# Altium PCB MotherBoard.PcbDoc
Units mil, origin at the board's own origin, x right, y up, seen from the top; angles counter-clockwise.
Board outline 6000 x 4000 mil, 2 copper layers (Top Layer, Bottom Layer); 39 components, 68 nets, 217 pads, 9 vias.
Unrouted connection lines stored in the file: 48.
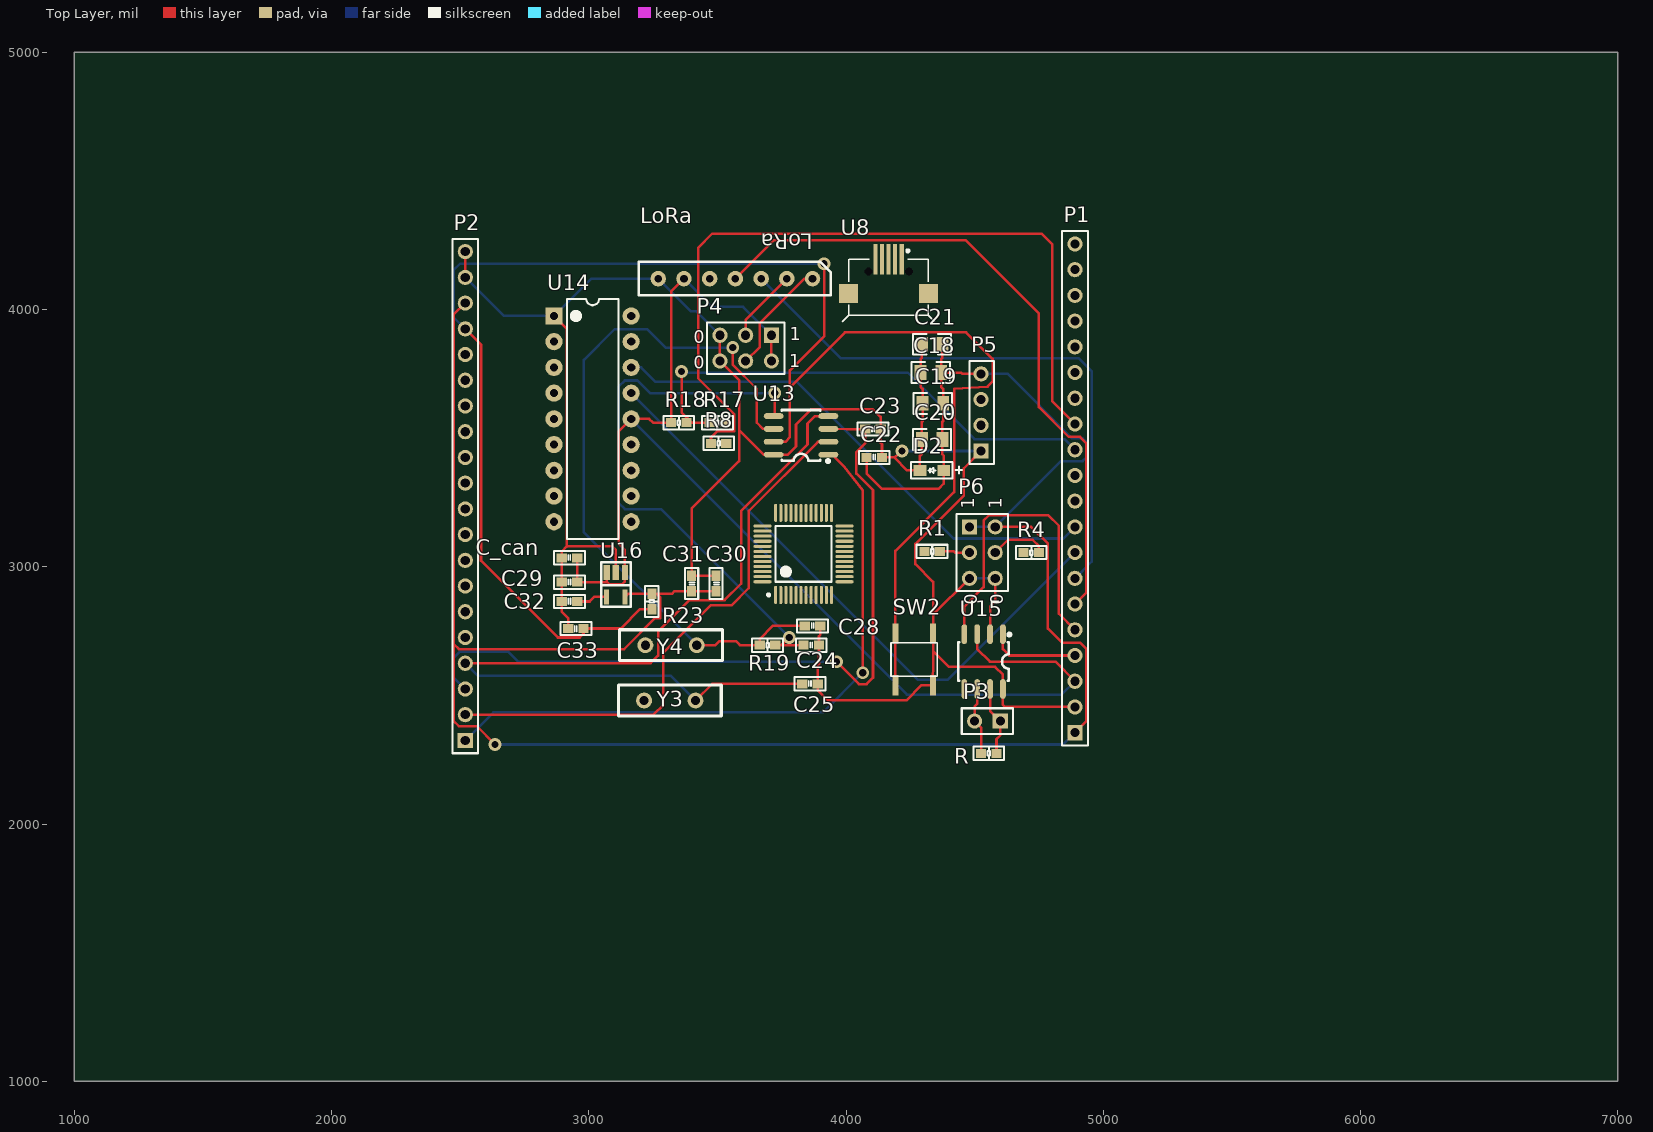
[diagram p0: Top Layer view]
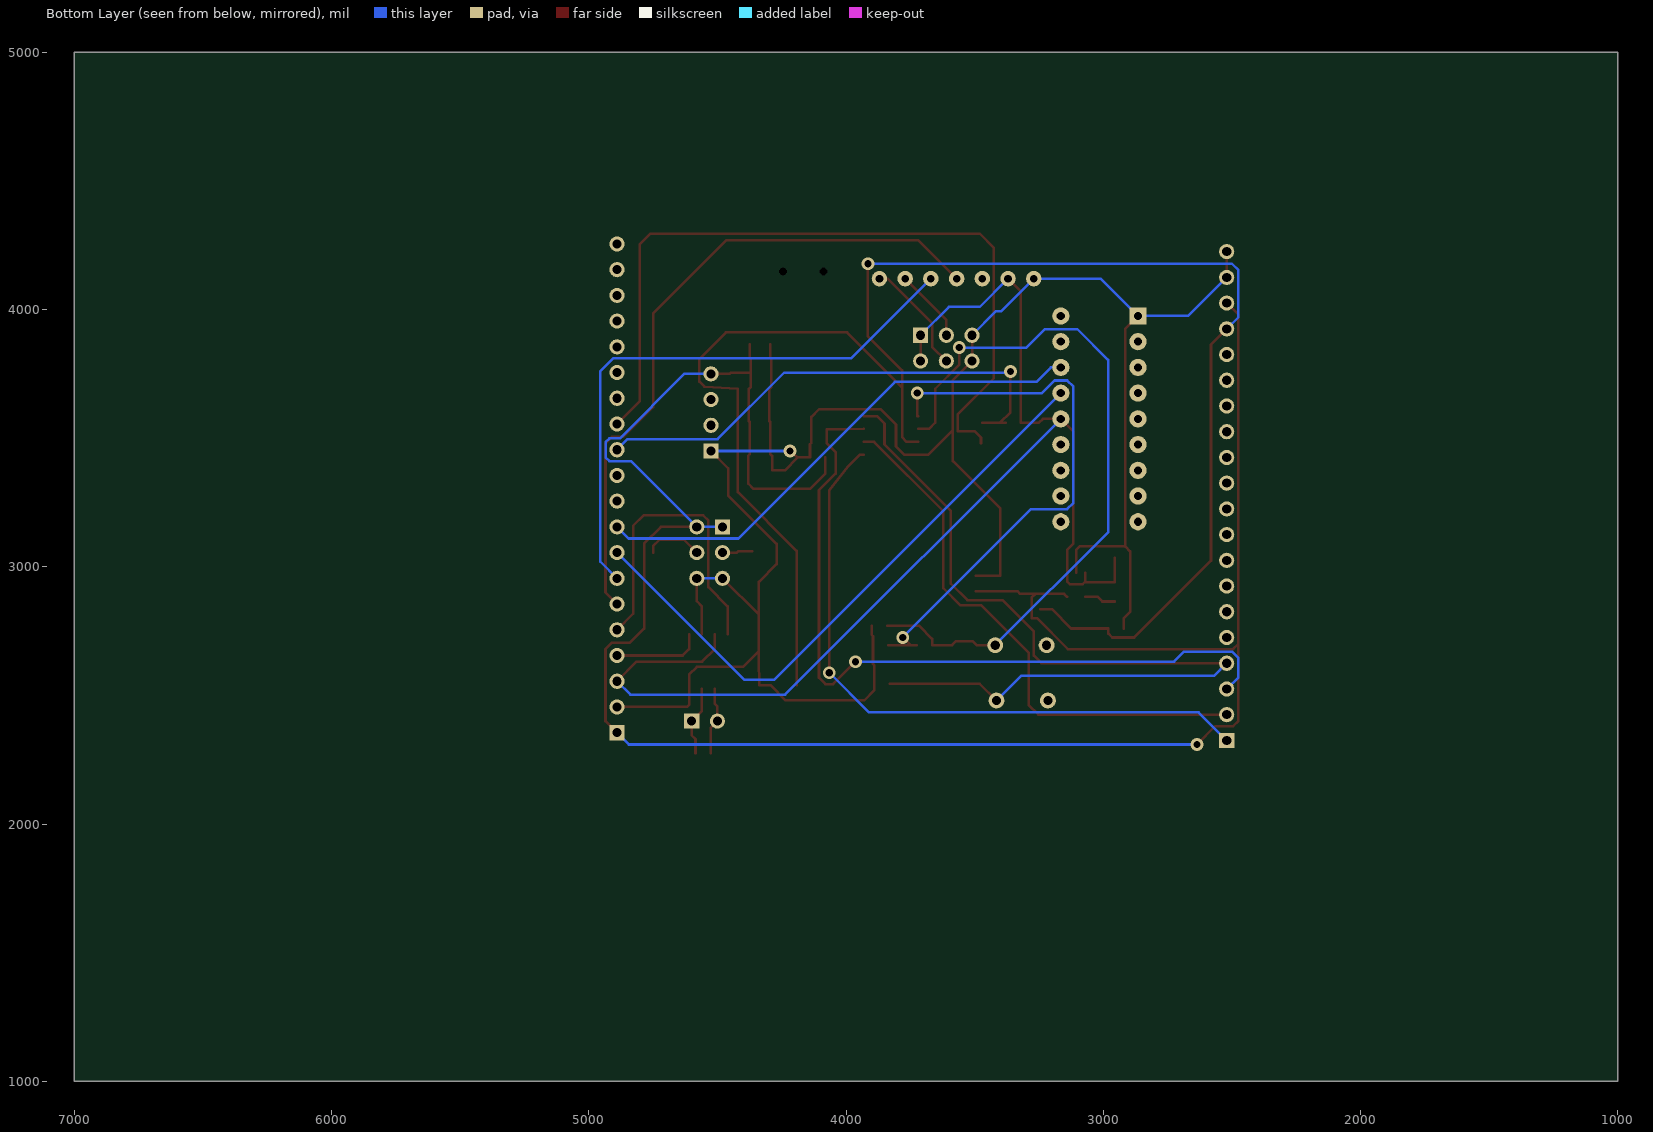
[diagram p1: Bottom Layer view, seen from below]

## Layer stack, top to bottom
Top Solder: solder mask 0.4, Solder Resist, Dk 3.5
Top Layer: signal copper 1.4
Dielectric 1: dielectric 12.6, FR-4, Dk 4.8
Bottom Layer: signal copper 1.4
Bottom Solder: solder mask 0.4, Solder Resist, Dk 3.5

## Board outline
1000,1000 7000,1000 7000,5000 1000,5000

## Design rules (kind name [scope] priority, off if disabled: settings)
Clearance [All] p1: gap=10 ignorepadtopadclearanceinfootprint=FALSE except(0: Arc-Hole Track-Hole SMDPad-Hole THPad-Hole Via-Hole Fill-Hole Poly-Hole Region-Hole Text-Hole)
PolygonConnect [All] p1: connectstyle=Relief reliefconductorwidth=10 reliefentries=4 polygonreliefangle="90 Angle" airgapwidth=10
RoutingVias [All] p1: holewidth=28 width=50 viastyle="Through Hole" minholewidth=28 minwidth=50 maxholewidth=28 maxwidth=50
SolderMaskExpansion [All] p1: expansion=4 istentingtop=FALSE
Width [All] p1: maxlimit=10 minlimit=10 preferedwidth=10
30 further rules are at their usual default settings.

## Components (designator, comment, footprint, x,y, rotation, side; value= is the part's Value field where it differs from the comment)
C18 "104" 0805 4330,3755 r0 top
C19 "104" 0805 4337.83,3635.39 r0 top
C20 "104" 0805 4335,3495 r0 top
C21 "104" 0805 4335,3865 r0 top
C22 "104,0603" C0603 4110,3425 r180 top value=104
C23 "20p,0603" C0603 4105,3535 r180 top value=104
C24 "20p,0603" C0603 3860,2545 r180 top value=104
C25 "20p,0603" C0603 3865,2695 r180 top value=104
C28 "20p,0603" C0603 3870,2770 r180 top value=104
C29 "105,0603" C0603 2925.08,2940 r180 top value=104
C30 "106,0603" C0603 3495,2934.92 r90 top value=104
C31 "104,0603" C0603 3400,2934.92 r90 top value=104
C32 "223,0603" C0603 2925.08,2865 r180 top value=104
C33 "105,0603" C0603 2950,2760 r0 top value=104
C_can "105,0603" C0603 2925,3035 r180 top value=104
D2 "LED" LED 4333.74,3375 r0 top
LoRa "LoRa_Output" LoRa_Output 4020,3720 r180 top
P1 "Header 20" HDR1X20 4890,2355 r90 top
P2 "Header 20" HDR1X20 2520,2325 r90 top
P3 "CAN Header" HDR1X2 4600,2400 r180 top
P4 "Header 3X2" HDR2X3 3710,3900 r180 top
P5 "SWD" HDR1X4 4525,3450 r90 top
P6 "Header 3X2" HDR2X3 4480,3155 r270 top
R "120R,0603" R0603 4555.08,2275 r0 top
R1 "100K,0603" R0603 4334.92,3060 r0 top
R4 "100K,0603" R0603 4720.08,3055 r0 top
R8 "20R,0603" R0603 3505.08,3480 r180 top
R17 "20R,0603" R0603 3499.92,3560 r180 top
R18 "4.7k,0603" R0603 3350,3560 r0 top
R19 "1M,0603" R0603 3695,2695 r0 top
R23 "10K,0603" R0603 3245,2865 r90 top
SW2 "SW-PB_V" KEY-SMT 4265,2640 r90 top
U8 "USB-mrico" Micro_USB 4165.59,4128.9 r0 top
U13 "STM32F103C8T6" 48P 3835,3050 r90 top
U14 "TM1636" DIP18 3015,3575 r0 top
U15 "TJA1050T/CM,118" SOIC-8_L5.0-W4.0-P1.27-LS6.0-BL 4535,2631.5 r180 top
U16 "RT9193" SOT-23-5 3105,2930 r180 top
Y3 "32.768K" XTAL1 3415,2480 r180 top
Y4 "8Mhz" XTAL1 3420,2695 r180 top

## Footprints (in the part's own frame and the unit in brackets; to place one, negate y for a bottom-side part, rotate by r counter-clockwise, add the part's x,y. Pads: shape width x height; smd on the part's side, far side on the other; paste and mask are expansions set on the pad)
48P [mm]
  oval 1.8x0.3 smd: 1(-4.05,2.75) 2(-4.05,2.25) 3(-4.05,1.75) 4(-4.05,1.25) 5(-4.05,0.75) 6(-4.05,0.25) 7(-4.05,-0.25) 8(-4.05,-0.75) 9(-4.05,-1.25) 10(-4.05,-1.75) 11(-4.05,-2.25) 12(-4.05,-2.75) 25(4.05,-2.75) 26(4.05,-2.25) 27(4.05,-1.75) 28(4.05,-1.25) 29(4.05,-0.75) 30(4.05,-0.25) 31(4.05,0.25) 32(4.05,0.75) 33(4.05,1.25) 34(4.05,1.75) 35(4.05,2.25) 36(4.05,2.75)
  oval 0.568x1.95 smd mask+0.051: 1(9.802,-2.454) 2(11.072,-2.454) 3(12.342,-2.454) 4(13.612,-2.454) 5(13.612,2.956) 6(12.342,2.956) 7(11.072,2.956) 8(9.802,2.956)
  oval 0.3x1.8 smd: 13(-2.75,-4.05) 14(-2.25,-4.05) 15(-1.75,-4.05) 16(-1.25,-4.05) 17(-0.75,-4.05) 18(-0.25,-4.05) 19(0.25,-4.05) 20(0.75,-4.05) 21(1.25,-4.05) 22(1.75,-4.05) 23(2.25,-4.05) 24(2.75,-4.05) 37(2.75,4.05) 38(2.25,4.05) 39(1.75,4.05) 40(1.25,4.05) 41(0.75,4.05) 42(0.25,4.05) 43(-0.25,4.05) 44(-0.75,4.05) 45(-1.25,4.05) 46(-1.75,4.05) 47(-2.25,4.05) 48(-2.75,4.05)
  silkscreen extent -4.17,-2.75 14.21,3.57, body extent -3.5,-3.5 3.5,3.5, height 1.6
0805 [mm]
  rect 1.16x1.45 smd: 1(-1.016,0) 2(1.016,0)
  silkscreen extent -1.9,-1.03 1.87,1.04
C0603 [mil]
  rect 40x35 smd: 1(-29.92,0) 2(29.92,0)
  silkscreen extent -60,-26 60,26
DIP18 [mm]
  rect 1.7x1.7 hole 0.8: 1(-3.81,10.16)
  round 1.7 hole 0.8: 2(-3.81,7.62) 3(-3.81,5.08) 4(-3.81,2.54) 5(-3.81,0) 6(-3.81,-2.54) 7(-3.81,-5.08) 8(-3.81,-7.62) 9(-3.81,-10.16) 10(3.81,-10.16) 11(3.81,-7.62) 12(3.81,-5.08) 13(3.81,-2.54) 14(3.81,0) 15(3.81,2.54) 16(3.81,5.08) 17(3.81,7.62) 18(3.81,10.16)
  silkscreen extent -2.54,-11.85 2.54,11.85, body extent -4,-11.54 4,11.56, height 4.35
HDR1X2 [mm] "Connector; Header; 2 Position"
  rect 1.5x1.5 hole 0.9: 1(0,0)
  round 1.5 hole 0.9: 2(2.54,0)
  silkscreen extent -1.27,-1.27 3.81,1.27
HDR1X4 [mm] "Connector; Header; 4 Position; Right Angle"
  rect 1.5x1.5 hole 0.9: 1(0,0)
  round 1.5 hole 0.9: 2(2.54,0) 3(5.08,0) 4(7.62,0)
  silkscreen extent -1.27,-1.27 8.89,1.14
HDR1X20 [mm] "Connector; Header; 20 Position"
  rect 1.5x1.5 hole 0.9: 1(0,0)
  round 1.5 hole 0.9: 2(2.54,0) 3(5.08,0) 4(7.62,0) 5(10.16,0) 6(12.7,0) 7(15.24,0) 8(17.78,0) 9(20.32,0) 10(22.86,0) 11(25.4,0) 12(27.94,0) 13(30.48,0) 14(33.02,0) 15(35.56,0) 16(38.1,0) 17(40.64,0) 18(43.18,0) 19(45.72,0) 20(48.26,0)
  silkscreen extent -1.27,-1.27 49.53,1.27
HDR2X3 [mm] "Connector; Header; 3x2 Position"
  rect 1.5x1.5 hole 0.9: 1(0,0)
  round 1.5 hole 0.9: 2(0,2.54) 3(2.54,0) 4(2.54,2.54) 5(5.08,0) 6(5.08,2.54)
  silkscreen extent -1.27,-1.27 6.35,3.81
KEY-SMT [mm]
  rect 2x0.6 smd: 1(-2.55,-1.85) 1(2.55,-1.87) 2(-2.55,1.85) 2(2.55,1.85)
  silkscreen extent -1.65,-2.29 1.65,2.29
LED [mil]
  rect 49x43 smd: 1(46.26,0) 2(-46.26,0)
  silkscreen extent -81,-31 118,31
LoRa_Output [mil]
  round 60 hole 30: 1(150,-400) 2(250,-400) 3(350,-400) 4(450,-400) 5(550,-400) 6(650,-400) 7(750,-400)
  silkscreen extent 80,-465 825,-335
Micro_USB [mm]
  rect 0.4x3 smd: 1(1.3,1.679) 2(0.65,1.679) 3(0,1.679) 4(-0.65,1.679) 5(-1.3,1.679)
  round 0 hole 0.8 unplated: MH1(2,0.471) MH2(-2,0.471)
  rect 1.9x1.9 smd: ""(-3.95,-1.679) ""(3.95,-1.679)
  silkscreen extent -4.57,-4.46 4.57,2.64
R0603 [mil]
  rect 40x35 smd: 1(-29.92,0) 2(29.92,0)
  silkscreen extent -60,-26 60,26
SOIC-8_L5.0-W4.0-P1.27-LS6.0-BL [mil]
  oval 22.38x76.78 smd mask+2: 1(-75,-106.5) 2(-25,-106.5) 3(25,-106.5) 4(75,-106.5) 5(75,106.5) 6(25,106.5) 7(-25,106.5) 8(-75,106.5)
  silkscreen extent -106,-111 98,75
SOT-23-5 [mm]
  rect 0.6x1.5 smd: 1(-0.9,-1.2) 2(0,-1.2)
  rect 0.63x1.5 smd: 3(0.9,-1.2)
  rect 0.5x1.5 smd: 4(0.9,1.2) 5(-0.9,1.2)
  silkscreen extent -1.47,-2.21 1.43,2.18
XTAL1 [mil]
  round 62 hole 35.43: 1(0,0) 2(200,0)
  silkscreen extent -100,-60 300,60

## Part data
C18 C19 C20 C21: library part 105, BOM_Manufacturer=FH, BOM_Manufacturer Part=0805B103K101NT, BOM_Supplier=LCSC, BOM_Supplier Part=C128805, Contributor=LCSC, nameAlias=Capacitance, spicePre=C, spiceSymbolName=0805B103K101NT
C22 C23 C24 C25 C28 C29 C30 C31 C32 C33 C_can: library part Cap, "Capacitor", LatestRevisionDate=17-Jul-2002, LatestRevisionNote="Re-released for DXP Platform.", Published=8-Jun-2000, Publisher="Altium Limited"
P1 P2: "Header, 20-Pin", LatestRevisionDate=17-Jul-2002, LatestRevisionNote="Re-released for DXP Platform.", Publisher="Altium Limited"
P3: library part "Header 2", "Header, 2-Pin", LatestRevisionDate=17-Jul-2002, LatestRevisionNote="Re-released for DXP Platform.", Publisher="Altium Limited"
P4 P6: "Header, 3-Pin, Dual row", LatestRevisionDate=17-Jul-2002, LatestRevisionNote="Re-released for DXP Platform.", Publisher="Altium Limited"
P5: library part "Header 4", "Header, 4-Pin", LatestRevisionDate=17-Jul-2002, LatestRevisionNote="Re-released for DXP Platform.", Publisher="Altium Limited"
R R1 R4 R8 R17 R18 R19 R23: library part Res2, "Resistor", LatestRevisionDate=17-Jul-2002, LatestRevisionNote="Re-released for DXP Platform.", Published=8-Jun-2000, Publisher="Altium Limited"
SW2: "SWITCH"
U8: library part usb-STM
U14: "TM1636LED控制芯片"
U15: JLCPCB Part Class="Basic Part", Manufacturer=NXP(恩智浦), Supply Voltage="4.75V ~ 5.25V", Add into BOM=yes, Convert to PCB=yes, Datasheet=https://atta.szlcsc.com/upload/public/pdf/source/20140411/1457707042917.pdf, Device=TJA1050T/CM,118, LCSC Part Name=TJA1050T/CM,118, Manufacturer Part=TJA1050T/CM,118, Name=TJA1050T/CM,118, Protocol=CAN总线, Supplier=LCSC, Supplier Footprint=SOIC-8_150mil, Supplier Part=C6952, Symbol=TJA1050T/CM,118, Type=收发器
U16: library part RT9193X_5P, ICA_MFR_NAME=RICHTEK, ICA_PARTNUM=$$2191094$$RT9193-15CU5, Part Number=TMP-13
Y3 Y4: library part XTAL, "Crystal Oscillator", LatestRevisionDate=17-Jul-2002, LatestRevisionNote="Re-released for DXP Platform.", Published=8-Jun-2000, Publisher="Altium Limited"

## Via types
v1: diameter 50, hole 28, Top Layer to Bottom Layer, 9 vias

## Nets (pads, with @x,y where several pads share a name; then routed paths per layer and width w, separated by ;. In a path a pad name is that pad's centre, name@x,y a point inside that pad or via, vN(x,y) a via of type N, cw(c..) or ccw(c..) an arc to the next point about the centre after c; other vN are vias at no path point)
3.3V: C18.2 C19.2 C20.2 C21.2 C22.2 C30.1 C31.1 D2.1 P1.1 P2.18 P5.4 P6.1 P6.2 R23.2 U13.9 U13.24 U13.36 U13.48 U16.5 | length 8778.6
  Top Layer w10: P2.18 2475,3980 2475,2700 ; v1(2636,2309) 2565,2380 2495,2380 2475,2400 2475,2700 ; U16.5 3152.6,2894.92 R23.2 3263.08,2894.92 ; C30.1 C31.1 3333.08,2905 3323,2894.92 3263.08,2894.92 ; C22.2 4080.08,3362.42 4139.5,3303 4360,3303 4380,3323 D2.1 4380,3432 4375,3437 C20.2 4375,3563 4377.83,3565.83 C19.2 4377.83,3691 4370,3698.83 C18.2 ; C21.2 4375,3812 4370,3807 C18.2 ; P5.4 4452,3750 4447,3755 C18.2 ; P6.2 4720,3155 4785,3090 4785,2760 4840,2705 4910,2705 4935,2680 4935,2400 P1.1 ; 2475,2700 2495,2680 3138,2680 3258,2800 3278,2800 3278,2880 3263.08,2894.92
  Bottom Layer w10: v1(2636,2309) 4844,2309 P1.1 ; P6.1 P6.2 4835.47,3410.47 4920,3410.47 4934.53,3425 4934.53,3485 4920,3499.53 4879.47,3499.53 4629,3750 P5.4
5V: C29.1 C_can.1 LoRa.6 P1.3 P4.1 P4.2 R18.1 U14.14 U15.3 U16.1 U16.3 | length 4942.8
  Top Layer w10: C_can.1 2954.92,2987.08 2955,2987 C29.1 3069.57,2940 3069.57,2942.43 ; U16.3 3069.57,2942.43 ; LoRa.6 3320.08,4070.08 R18.1 3250,3560 3235,3575 U14.14 3116,3526 3116,3090.43 3140.43,3066 U16.1 3140.43,2942.43 3130,2932 3080,2932 3069.57,2942.43 ; P4.2 P4.1 ; U15.3 4510,2680 4559,2631 4814,2631 P1.3
  Bottom Layer w10: U14.14 4237,2503 4838,2503 P1.3 ; LoRa.6 3480,4010 3600,4010 P4.1
A0: P2.5 U13.10
A1: P2.6 U13.11
A2: P2.7 U13.12
A3: P2.8 U13.13
A4: P2.9 U13.14
A5: P2.10 U13.15
A6: P2.11 U13.16
A7: P2.12 U13.17
A8: P1.16 U13.29
A9: P1.15 U13.30
A10: P1.14 U13.31
A11: P1.13 R8.2 U13.32 | length 3044.7
  Top Layer w10: R8.2 3475.16,3502.16 3500,3527 3564.84,3527 3564.84,3593 3425,3732.84 3425,4240 3480,4295 4760,4295 4802,4253 4802,3643 P1.13
A12: P1.12 R17.2 R18.2 U13.33 | length 1960.6
  Top Layer w10: v1(3361,3759) 3361,3600 3401,3560 ; R18.2 3401,3560 ; R17.2 3424,3560 3401,3560
  Bottom Layer w10: v1(3361,3759) 3365,3755 4240,3755 4499,3496 4849,3496 P1.12
A15: P1.11 U13.38
B0: P2.13 U13.18
B1: P2.14 U13.19
B3: P1.10 U13.39
B4: P1.9 U13.40 U14.16 | length 2019.1
  Bottom Layer w10: U14.16 3203.47,3775 3259.9,3718.56 3809.44,3718.56 4418,3110 4845,3110 P1.9
B5: P1.8 U13.41 U14.15 | length 2391.9
  Bottom Layer w10: U14.15 4280,2560 4395,2560 P1.8
B6: LoRa.3 P1.7 U13.42 | length 2265.6
  Bottom Layer w10: LoRa.3 3980,3810 4905,3810 4954.53,3760.47 4954.53,3019.53 P1.7
B7: LoRa.4 P1.6 U13.43 | length 2611.2
  Top Layer w10: LoRa.4 3720,4270 4465,4270 4750,3985 4750,3621 4866,3505 4910,3505 4935,3480 4935,2900 P1.6
B8: P1.5 U13.45 U15.4 | length 1221
  Top Layer w10: U15.4 4460,2846 4535,2921 4535,3180 4555,3200 4787,3200 4827,3160 4827,2818 P1.5
B9: P1.4 U13.46 U15.1 | length 348.4
  Top Layer w10: U15.1 4610,2680 4635,2655 P1.4
B10: P2.15 U13.21
B11: P2.16 U13.22
B12: P1.20 U13.25
B13: P1.19 U13.26
B14: P1.18 U13.27
B15: P1.17 U13.28
BOOT0: R4.1 U13.44
BOOT1: R1.1 U13.20
C13: P2.2 U13.2 | length 2145.7
  Top Layer w10: P2.2 3252,2425 3290.32,2463.32 3290.32,2666.32 3474,2850 3555,2850 3622,2917 3622,3217 3890.91,3485.91 U13.2@3931.61,3485.91
C14: C23.2 P2.3 U13.3 | length 2992.5
  Top Layer w10: U13.3@3931.61,3535.91 4002.91,3535 C23.2 4075.08,3481.08 4040,3446 4040,3362.54 4105,3297.54 4105,2569 4080,2544 4050,2544 v1(3963,2631)
  Bottom Layer w10: P2.3 2475,2570 2475,2645 2500,2670 2686,2670 2725,2631 v1(3963,2631)
C15: C24.2 P2.4 U13.4 Y3.1 | length 3474.5
  Top Layer w10: P2.4 3240,2625 3270,2655 3270,2748.21 3391.79,2870 3528,2870 3592,2934 3592,3217 3850.37,3475.37 3850.37,3556.28 3880,3585.91 U13.4@3931.61,3585.91 ; Y3.1 3480,2545 C24.2
  Bottom Layer w10: P2.4 2568,2577 3318,2577 Y3.1
CANH: P3.1 R.2 U15.7 | length 272.8
  Top Layer w10: U15.7 4560,2440 P3.1 4600,2345 4585,2330 R.2
CANL: P3.2 R.1 U15.6 | length 264.6
  Top Layer w10: U15.6 4510,2467 4500,2457 P3.2 4525.16,2374.84 R.1
GND: C18.1 C19.1 C20.1 C21.1 C22.1 C23.1 C24.1 C25.1 C28.1 C29.2 C30.2 C31.2 C32.2 C33.1 C_can.2 D2.2 LoRa.7 P1.2 P2.19 P2.20 P4.5 P4.6 P5.1 P6.5 P6.6 SW2.1 U13.8 U13.23 U13.35 U13.47 U14.1 U15.2 U15.8 U16.2 | length 8900.5
  Top Layer w10: P2.19 P2.20 ; U14.1 2914,3926 2914,3078.92 ; C33.1 2920.08,2800 2895.16,2824.92 C32.2 C29.2 2895.16,2987 2895.08,2987.08 C_can.2 2895.08,3060 2914,3078.92 ; U16.2 3105,3065 3090,3080 2914,3078.92 ; C30.2 C31.2 3400,3226 3584.84,3410.84 3584.84,3531.07 ; P4.5 P4.6 3584.84,3725.16 3584.84,3531.07 ; C28.1 3899.92,2735 3894.92,2730 C25.1 3894.92,2622 3889.92,2617 C24.1 3889.92,2520.19 3929.12,2481 4235,2481 4293.61,2539.61 4337.83,2539.61 4338.62,2639.79 4338.62,2672.38 ; v1(4218,3450) 4188,3425 ; C21.1 4295,3812 4290,3807 C18.1 4290,3698.83 4297.83,3691 C19.1 4297.83,3565.83 4295,3563 C20.1 4295,3438.52 4287.48,3431 D2.2 4238,3375 4188,3425 ; P6.5 4338.62,2813.62 ; P5.1 4458,3383 4458,3277 4270,3089 4270,3010 4338.62,2941.38 4338.62,2813.62 ; U15.2 4560,2846 4580,2866 P6.6 ; P1.2 4618,2455 4610,2463 U15.8 4610,2581 4580,2611 4400,2611 4338.62,2672.38 ; 3584.84,3531.07 3680,3435.91 3718.61,3435.91 3773.66,3435.91 3805.72,3467.97 3805.72,3552.72 3866,3613 4104,3613 4134.92,3582.08 C23.1 4134.92,3482 4139.92,3477 C22.1 4188,3425 ; 4338.62,2672.38 4338.62,2740.39 4338.62,2813.62
  Bottom Layer w10: P2.19 2670,3975 U14.1 3010,4120 LoRa.7 3396,3994 3416,3994 P4.5 ; v1(4218,3450) P5.1 ; P6.5 P6.6
GRID1: U14.13
GRID2: U14.12
GRID3: U14.11
MD0: LoRa.1 P4.4 | length 446.4
  Top Layer w10: P4.4 3665,3855 3665,3947 3838,4120 LoRa.1
MD1: LoRa.2 P4.3 | length 286.3
  Top Layer w10: P4.3 3610,3960 LoRa.2
NetC32_1: C32.1 U16.4 | length 121.9
  Top Layer w10: C32.1 3003,2865 3020.76,2882.76 U16.4
NetD1_K: 
NetP6_3: P6.3 R1.2 | length 117.2
  Top Layer w10: R1.2 4419,3060 4424,3055 P6.3
NetP6_4: P6.4 R4.2 | length 226.1
  Top Layer w10: P6.4 4630,3105 4725,3105 4750,3080 R4.2
NetQ1_B: 
NetQ1_C: 
NetR2_1: 
NetR8_1: R8.1
NetR17_1: R17.1
OSCIN: C25.2 R19.2 U13.5 | length 2214.9
  Top Layer w10: U13.5@3718.61,3585.91 3723,3585.91 v1(3723,3675) ; R19.2 3750,2695 ; v1(3779.5,2724.5) 3750,2695 ; C25.2 3750,2695
  Bottom Layer w10: v1(3723,3675) 3238.47,3675 3189.47,3724 3140,3724 3116,3700 3116,3248 3140,3224 3280,3224 v1(3779.5,2724.5)
OSCOUT: C28.2 R19.1 U13.6 Y4.1 | length 2834.5
  Top Layer w10: Y4.1 3492,2695 3508,2711 3571.96,2711 3587.96,2695 R19.1 3665.08,2720 3715.08,2770 C28.2 ; v1(3560,3852) 3560,3785 3653,3692 3653,3560 3677.09,3535.91 U13.6@3718.61,3535.91
  Bottom Layer w10: Y4.1 2981,3134 2981,3804 3101,3924 3227,3924 3299,3852 v1(3560,3852)
RESET: C33.2 P2.17 R23.1 SW2.2 U13.7 | length 6681.1
  Top Layer w10: P2.17 2581,3864 2581,3024 2880,2725 2964.92,2725 2979.92,2740 C33.2 3124.92,2760 3200,2835.08 R23.1 ; U13.7@3718.61,3485.91 3764,3485.91 3782,3503.91 3782,3697 ; v1(3915,4178) 3915,3896 3782,3763 3782,3697 ; SW2.2@4192.17,2539.61 4192.17,2740.39 4192.17,3062.17 4420,3290 4420,3692 4550,3700 4570,3720 4570,3808 4467,3911 3996,3911 3782,3697
  Bottom Layer w10: P2.17 2475,3970 2475,4153 2500,4178 v1(3915,4178)
SEG1: U14.2
SEG2: U14.3
SEG3: U14.4
SEG4: U14.5
SEG5: U14.6
SEG6: U14.7
SEG7: U14.8
SEG8: U14.9
SWCLK: P5.2 U13.37
SWIO: P5.3 U13.34
VB: P2.1 U13.1 | length 2560.7
  Top Layer w10: U13.1@3931.61,3435.91 3946.09,3435.91 3991.68,3390.32 4065,3297.5 v1(4065,2588)
  Bottom Layer w10: P2.1 2629,2434 3911,2434 v1(4065,2588)
Vin=24V: 
pads on no net: LoRa.5 U8. U8.1 U8.2 U8.3 U8.4 U8.5 U8.MH1 U8.MH2 U14.10 U14.17 U14.18 U15.5 Y3.2 Y4.2

## Text inside footprints (layer, text, board x,y; h text height)
P4: Top Overlay "1" at 3781.15,3880.87 h50; Top Overlay "1" at 3780,3775 h50; Top Overlay "0" at 3450,3920 h50 r180; Top Overlay "0" at 3450,3820 h50 r180
P6: Top Overlay "1" at 4499.13,3226.15 h50 r90; Top Overlay "1" at 4605,3225 h50 r90; Top Overlay "0" at 4460,2895 h50 r270; Top Overlay "0" at 4560,2895 h50 r270